# Altium PCB esp32-devkit-evse_未修改老版本.pcbdoc
Units mil, origin at the board's own origin, x right, y up, seen from the top; angles counter-clockwise.
Board outline 4947.01 x 3845 mil, 2 copper layers (Top Layer, Bottom Layer); 52 components, 67 nets, 171 pads, 0 vias.
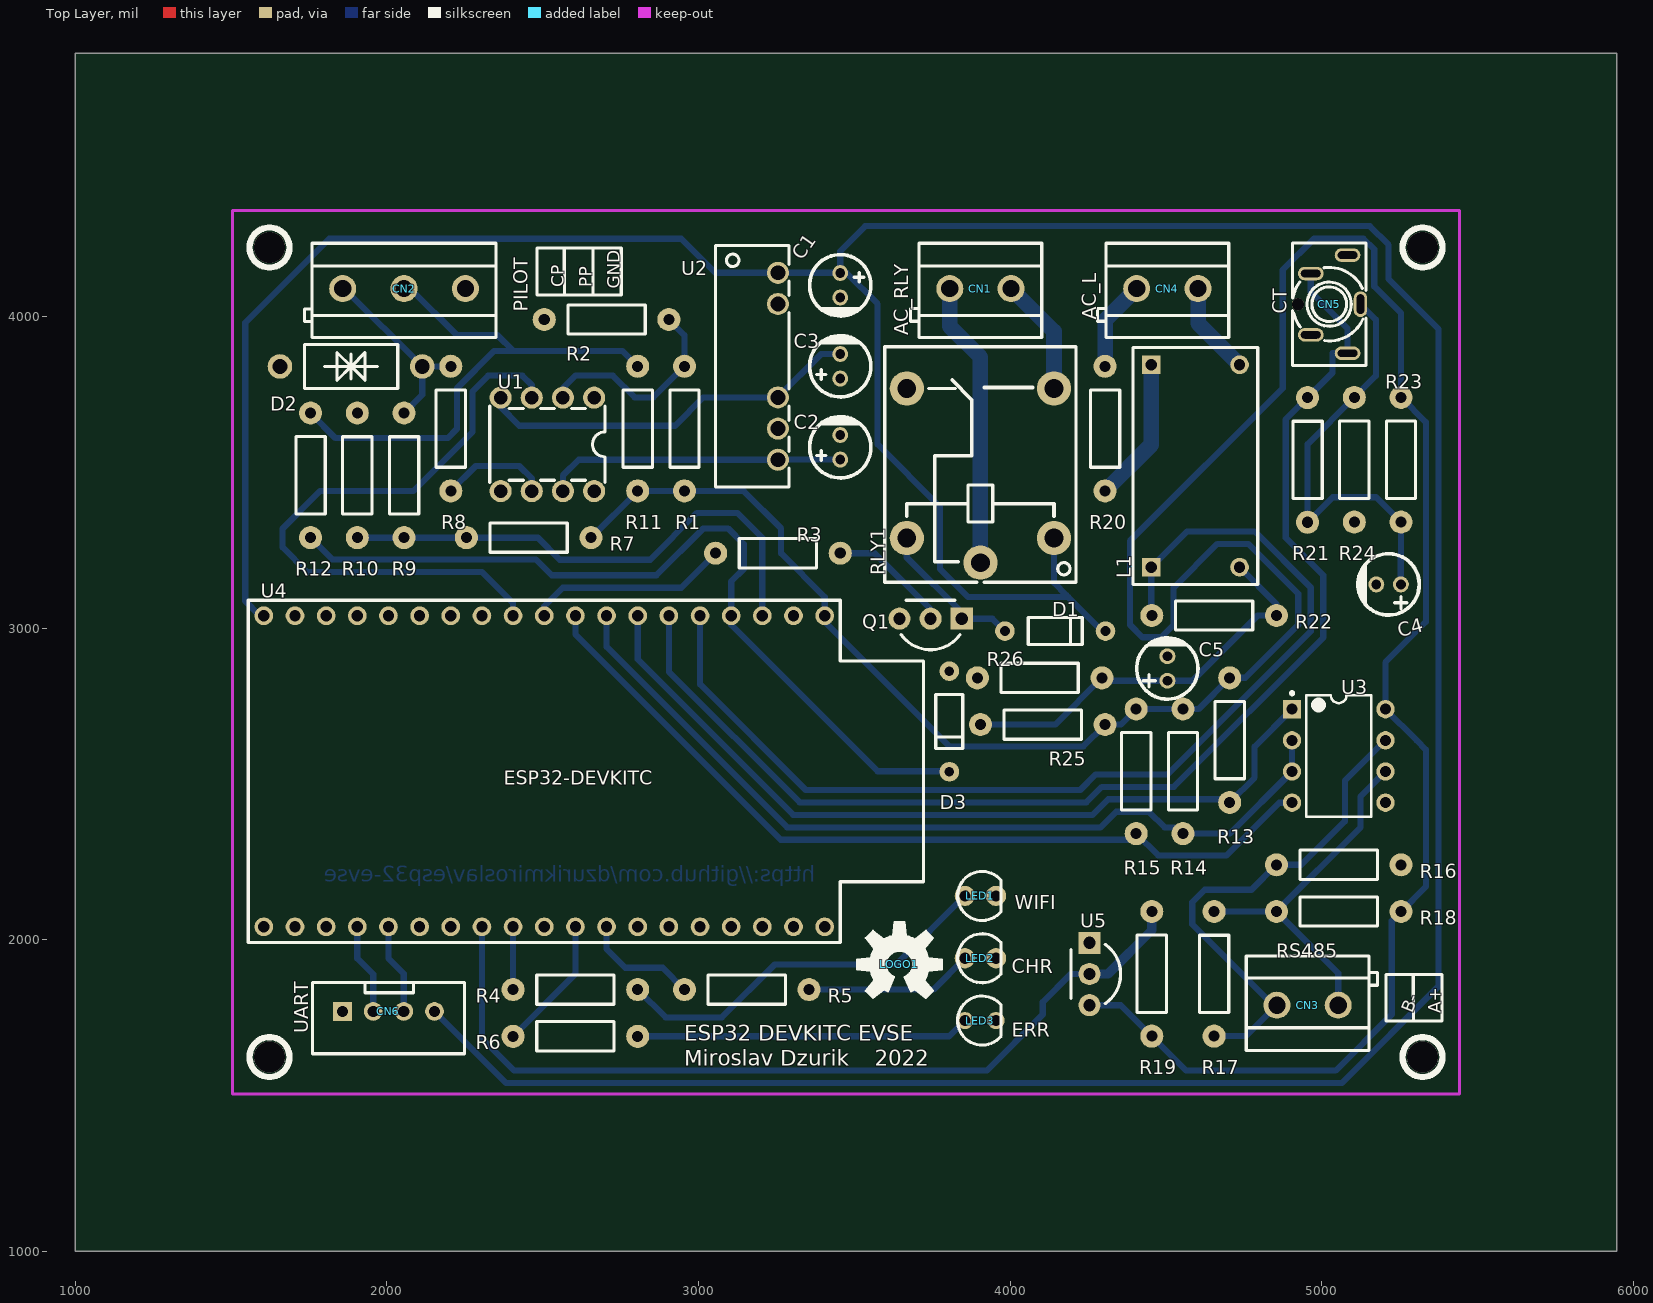
[diagram p0: Top Layer view]
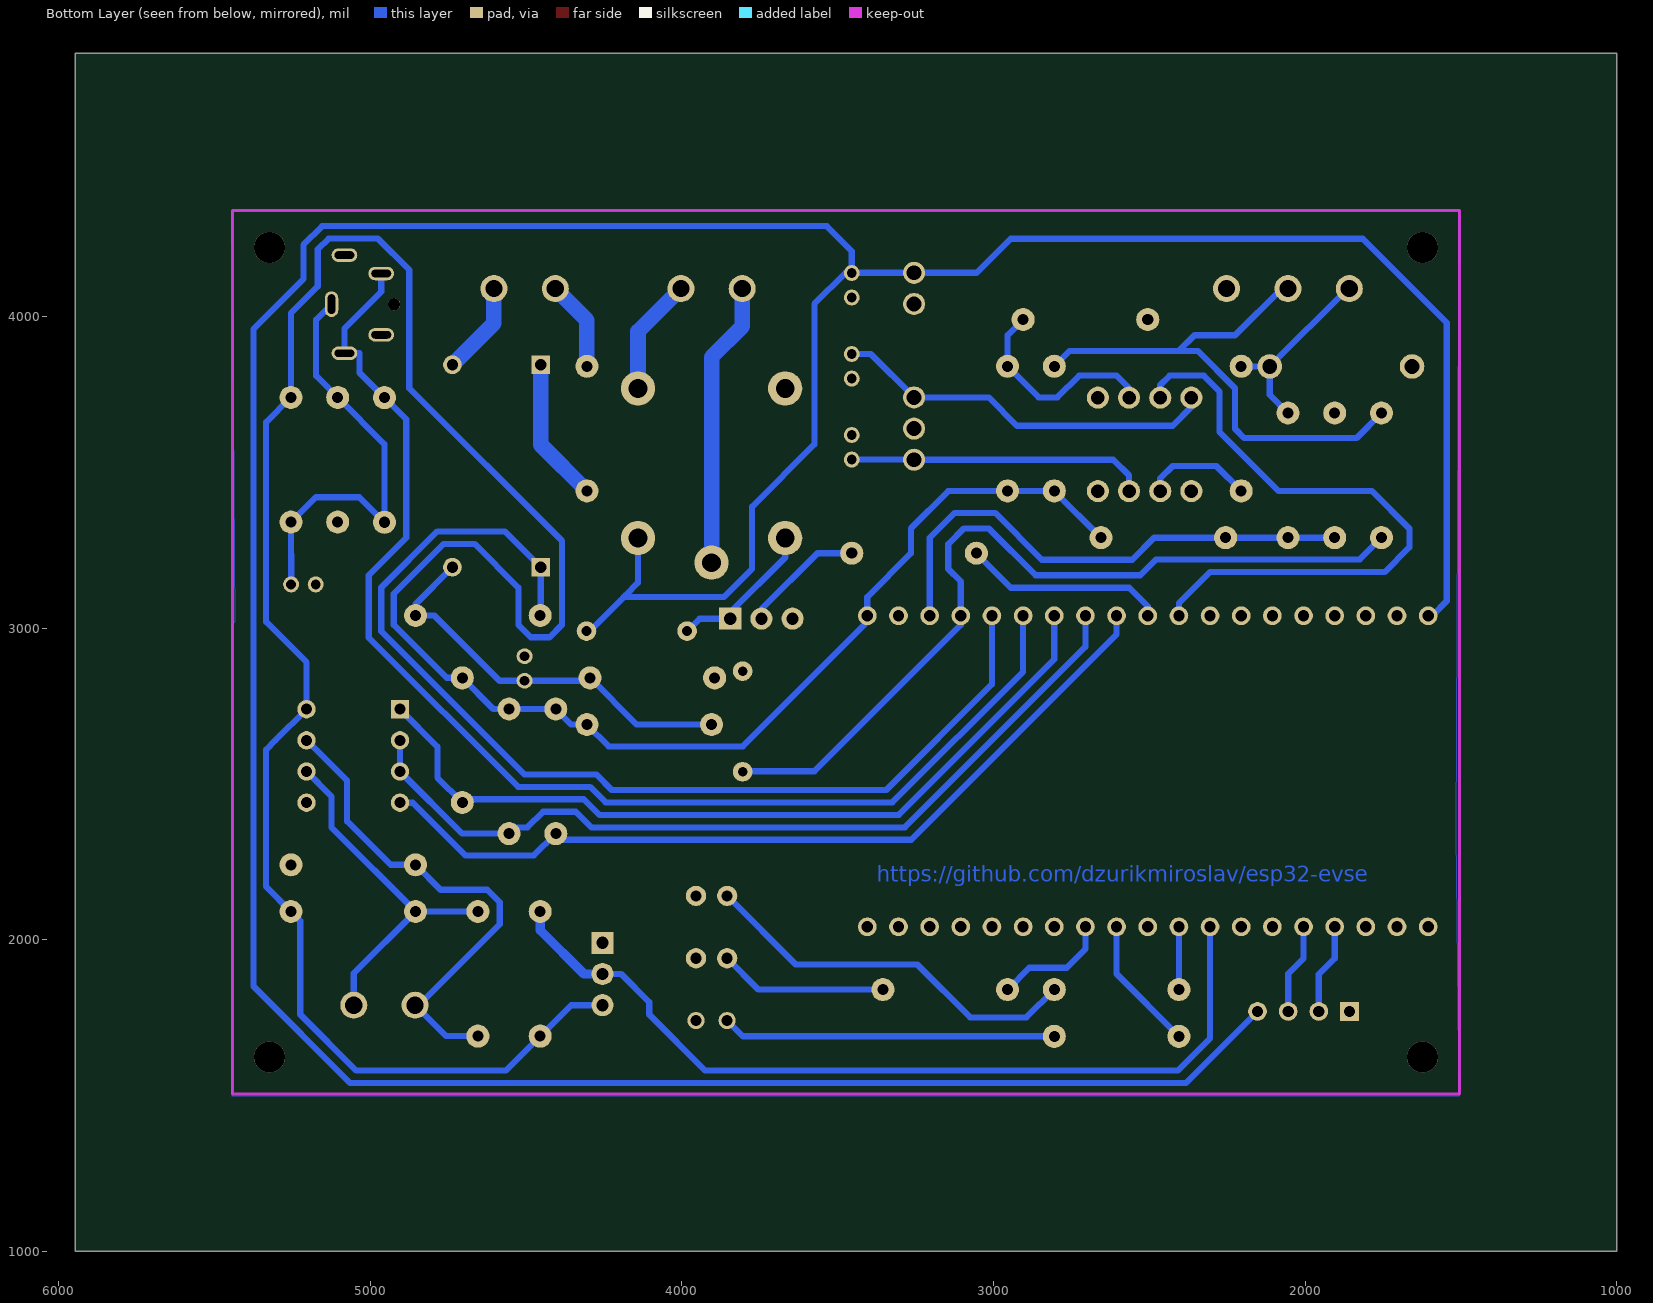
[diagram p1: Bottom Layer view, seen from below]

## Layer stack, top to bottom
Top Layer: signal copper (thickness not stored)
Dielectric: dielectric 12.6, FR-4, Dk 4.8
Bottom Layer: signal copper (thickness not stored)

## Board outline
5947.01,1000 1000,1000 1000,4845 5947.01,4845

## Components (designator, comment, footprint, x,y, rotation, side; value= is the part's Value field where it differs from the comment)
C1 "4u7" CAP-D5.0×F2.0 3455,4100.62 r270 top
C2 "1u" CAP-D5.0×F2.0 3454.95,3580.6 r90 top
C3 "1u" CAP-D5.0×F2.0 3454.95,3840.6 r90 top
C4 "10uF" CAP-TH_BD5.0-P2.00-D0.8-FD 5215,3140.62 r180 top
C5 "10uF" CAP-TH_BD5.0-P2.00-D0.8-FD 4505.04,2870.59 r90 top
CN1 "AC_RLY" CONN-TH_P5.00_KF301-5.0-2P 3904.98,4089.99 r180 top
CN2 "PILOT" CONN-TH_3P-P5.00_KF301-5.0-3P 2055,4089.99 r180 top
CN3 "RS485" CONN-TH_P5.00_KF301-5.0-2P 4954.98,1789.99 r0 top
CN4 "AC_L" CONN-TH_P5.00_KF301-5.0-2P 4504.98,4089.99 r180 top
CN5 "CT" AUDIO-TH_HOOYA_PJ-358 5045,4039.96 r270 top
CN6 "UART" CONN-TH_B4B-XH-A-G 2005.04,1769.99 r0 top
D1 "1N4148" DO-35_BD2.0-L4.2-P8.20-D0.5-RD 4145,2990.59 r180 top
D2 "P6KE16CA" DO-15_BD3.1-L6.7-P10.70-D0.9-BI 1885,3839.99 r0 top
D3 "BAT46" DO-35_BD2.0-L4.2-P8.20-D0.5-RD 3805,2700.59 r90 top
L1 "Qingxian" ZMPT107-1 4595,3520.62 r90 top
LED1 "WIFI" LED-TH_BD3.0_BLUE 3905,2140.62 r90 top
LED2 "CHR" LED-TH_BD3.0_GREEN 3905,1940.62 r90 top
LED3 "ERR" LED-TH_BD3.0_RED 3905,1740.62 r90 top
LOGO1 "OSHW-LOGOL" OSHW-LOGO-L 3645,1920.62 r0 top
Q1 "BC547B" TO-92-3_L4.9-W3.7-P2.54-L 3745,3030.62 r180 top
R1 "100K" R_AXIAL-0.4 2955,3640.62 r90 top
R2 "100K" R_AXIAL-0.4 2705,3990.62 r180 top
R3 "330" R_AXIAL-0.4 3255,3240.62 r0 top
R4 "330" R_AXIAL-0.4 2605,1839.99 r0 top
R5 "330" R_AXIAL-0.4 3155,1839.99 r0 top
R6 "330" R_AXIAL-0.4 2605,1689.99 r0 top
R7 "56K" R_AXIAL-0.4 2455,3290.59 r180 top
R8 "1K" R_AXIAL-0.4 2205,3640.62 r90 top
R9 "270K" R_AXIAL-0.4 2055,3490.59 r270 top
R10 "68K" R_AXIAL-0.4 1905,3490.59 r90 top
R11 "1K" R_AXIAL-0.4 2805,3640.62 r90 top
R12 "10K" R_AXIAL-0.4 1755,3490.62 r270 top
R13 "10K" R_AXIAL-0.4 4705,2640.62 r270 top
R14 "10K" R_AXIAL-0.4 4555,2540.62 r270 top
R15 "10K" R_AXIAL-0.4 4405,2540.62 r270 top
R16 "1K" R_AXIAL-0.4 5055,2240.59 r180 top
R17 "120" R_AXIAL-0.4 4655,1890.6 r90 top
R18 "1K" R_AXIAL-0.4 5055,2090.62 r0 top
R19 "4K7" R_AXIAL-0.4 4455,1890.62 r90 top
R20 "470K" R_AXIAL-0.4 4305,3640.59 r270 top
R21 "22" R_AXIAL-0.4 4955,3539.99 r270 top
R22 "1K" R_AXIAL-0.4 4655,3040.62 r0 top
R23 "100K" R_AXIAL-0.4 5255,3540.62 r270 top
R24 "100K" R_AXIAL-0.4 5105,3540.62 r270 top
R25 "100K" R_AXIAL-0.4 4105,2690.62 r180 top
R26 "100K" R_AXIAL-0.4 4095,2840.62 r180 top
RLY1 "SRD-05VDC-SL-C" RELAY-TH_SRD-XXVDC-XL-C 3905,3490 r90 top
U1 "TL081CP" PDIP-8_L9.3-W6.4-P2.54-LS7.6-BL 2515,3589.97 r180 top
U2 "E0512S-1WR3" PWRM-TH_E05XXS-1WR3 3255,3840.62 r270 top
U3 "MAX3485CPA" DIP-8_L9.8-W6.6-P2.54-LS7.6-BL 5055,2589.99 r270 top
U4 "ESP32-DEVKITC" ESP32-DEVKITC-32D 2505,2540.59 r180 top
U5 "DS18B20" TO-92-3_L4.9-W3.7-P2.54-L 4255,1889.99 r270 top

## Footprints (in the part's own frame and the unit in brackets; to place one, negate y for a bottom-side part, rotate by r counter-clockwise, add the part's x,y. Pads: shape width x height; smd on the part's side, far side on the other; paste and mask are expansions set on the pad)
AUDIO-TH_HOOYA_PJ-358 [mm]
  oval 2.1x1.1 hole 0.6 slot 1.6 at 0 deg: 2(0,2.025)
  oval 1.1x2.1 hole 0.6 slot 1.6 at 90 deg: 3(-4,0.975) 4(-2.5,-2.025) 5(2.5,-2.025) 6(4,0.975)
  round 1 hole 1 unplated: ""(0,-3.075)
  silkscreen extent -5,-3.52 5,2.48
CAP-D5.0×F2.0 [mm]
  round 1.3 hole 0.8: 1(-1,0) 2(1,0)
  silkscreen extent -2.5,-2.5 2.5,2.5
CAP-TH_BD5.0-P2.00-D0.8-FD [mm]
  round 1.3 hole 0.8: 1(-1,0) 2(1,0)
  silkscreen extent -2.5,-2.5 2.5,2.5
CONN-TH_3P-P5.00_KF301-5.0-3P [mm]
  round 2.2 hole 1.4: 1(-5,0) 2(0,0) 3(5,0)
  silkscreen extent -7.5,-3.7 8.13,4
CONN-TH_B4B-XH-A-G [mil]
  rect 60x60 hole 36: 1(-147.64,0)
  round 60 hole 36: 2(-49.21,0) 3(49.21,0) 4(147.64,0)
  silkscreen extent -244,-136 244,93
CONN-TH_P5.00_KF301-5.0-2P [mm]
  round 2.2 hole 1.4: 1(-2.5,0) 2(2.5,0)
  silkscreen extent -5,-3.7 5.71,4
DIP-8_L9.8-W6.6-P2.54-LS7.6-BL [mm]
  rect 1.5x1.5 hole 0.9: 1(-3.81,-3.81)
  round 1.5 hole 0.9: 2(-1.27,-3.81) 3(1.27,-3.81) 4(3.81,-3.81) 5(3.81,3.81) 6(1.27,3.81) 7(-1.27,3.81) 8(-3.81,3.81)
  silkscreen extent -5.23,-3.93 4.96,2.65
DO-15_BD3.1-L6.7-P10.70-D0.9-BI [mm]
  round 2 hole 1.2: 1(-5.8,0) 2(5.8,0)
  silkscreen extent -3.8,-1.8 3.8,1.8
DO-35_BD2.0-L4.2-P8.20-D0.5-RD [mm]
  round 1.6 hole 0.8: 1(-4.1,0) 2(4.1,0)
  silkscreen extent -2.2,-1.1 2.2,1.1
ESP32-DEVKITC-32D [mil]
  round 60 hole 36: 1(-900,-499.21) 2(-800,-499.21) 3(-700,-499.21) 4(-600,-499.21) 5(-500,-499.21) 6(-400,-499.21) 7(-300,-499.21) 8(-200,-499.21) 9(-100,-499.21) 10(0,-499.21) 11(100,-499.21) 12(200,-499.21) 13(300,-499.21) 14(400,-499.21) 15(500,-499.21) 16(600,-499.21) 17(700,-499.21) 18(800,-499.21) 19(900,-499.21) 20(-900,499.21) 21(-800,499.21) 22(-700,499.21) 23(-600,499.21) 24(-500,499.21) 25(-400,499.21) 26(-300,499.21) 27(-200,499.21) 28(-100,499.21) 29(0,499.21) 30(100,499.21) 31(200,499.21) 32(300,499.21) 33(400,499.21) 34(500,499.21) 35(600,499.21) 36(700,499.21) 37(800,499.21) 38(900,499.21)
  silkscreen extent -1218,-549 950,549
LED-TH_BD3.0_BLUE [mil]
  round 65 hole 35.43: 1(0,50) 2(0,-50)
  silkscreen extent -79,-66 79,73
LED-TH_BD3.0_GREEN [mil]
  round 65 hole 35.43: 1(0,50) 2(0,-50)
  silkscreen extent -79,-66 79,73
LED-TH_BD3.0_RED [mm]
  round 1.4 hole 0.9: 1(0,1.27) 2(0,-1.27)
  silkscreen extent -2,-1.69 2,1.87
OSHW-LOGO-L [mil]
  silkscreen extent -137,-109 137,137
PDIP-8_L9.3-W6.4-P2.54-LS7.6-BL [mm]
  round 1.8 hole 1.1: 1(-3.81,-3.81) 2(-1.27,-3.81) 3(1.27,-3.81) 4(3.81,-3.81) 5(3.81,3.81) 6(1.27,3.81) 7(-1.27,3.81) 8(-3.81,3.81)
  silkscreen extent -4.7,-3.11 4.7,3.11
PWRM-TH_E05XXS-1WR3 [mm]
  round 1.8 hole 1.2: 1(-7.62,0) 2(-5.08,0) 5(2.54,0) 6(5.08,0) 7(7.62,0)
  silkscreen extent -9.85,-5.1 9.85,0.9
R_AXIAL-0.4 [mil]
  round 74 hole 35.4: 1(-200,0) 2(200,0)
  silkscreen extent -124,-47 124,47
RELAY-TH_SRD-XXVDC-XL-C [mil]
  round 110 hole 60: 1(-200.79,-236.22) 2(279.53,-236.2) 3(279.53,236.2) 4(-200.79,236.22) 5(-279.53,0)
  silkscreen extent -342,-307 413,307
TO-92-3_L4.9-W3.7-P2.54-L [mm]
  rect 1.8x1.8 hole 1: 1(-2.54,0)
  round 1.8 hole 1: 2(0,0) 3(2.54,0)
  silkscreen extent -2.41,-1.5 2.41,2.54
ZMPT107-1 [mil]
  rect 60x60 hole 35.98: 1(-324.8,141.73) 3(324.8,141.73)
  round 60 hole 35.98: 2(-324.8,-141.73) 4(324.8,-141.73)
  silkscreen extent -380,-200 380,200

## Free pads (board coordinates)
  round 100 hole 100 unplated: ""(1623.11,1623.46) ""(1623.11,4221.89) ""(5323.89,1623.46) ""(5323.89,4221.89)

## Nets (pads, with @x,y where several pads share a name; then routed paths per layer and width w, separated by ;. In a path a pad name is that pad's centre, name@x,y a point inside that pad or via, vN(x,y) a via of type N, cw(c..) or ccw(c..) an arc to the next point about the centre after c; other vN are vias at no path point)
1WIRE: R19.2 U4.31 U5.2 | length 2820.7
  Bottom Layer w20: U4.31 2305,1683.69 2408.69,1580 3925,1580 4105,1760 4105,1800 4195,1890 U5.2
  Bottom Layer w30: U5.2 4314.4,1889.99 4455,2030.6 R19.2
+3V3: R1.1 R7.1 R11.1 R13.1 R14.1 R15.1 R18.2 R19.1 R23.1 R25.1 U3.8 U4.1 U5.3 | length 9345.8
  Bottom Layer w20: R7.1@2655,3290 2805,3440 2955,3440 3145,3440 3265,3320 3265,3240 3405,3100 U4.1 3405,3020 3804.37,2620.63 4235.04,2620.63 R25.1 ; U5.3 4354.99,1790 4455,1690 4564.99,1580 5045,1580 5225,1760 5225,2060.62 R18.2 5335,2170.59 5335,2609.99 5305,2639.99 U3.8 5205,2890 5335,3020 5335,3660.62 R23.1 5255,4010.59 5168.7,4096.9 5168.7,4216.3 5134.4,4250.6 4975.6,4250.6 4875,4149.99 4875,3769.99 4385,3279.99 4385,3010.59 4425,2970.59 4485,2970.59 4525,3010.59 4525,3129.99 4665.6,3270.59 4765,3270.59 4925,3110.59 4925,3010.59 4755,2840.59 R13.1 4605,2740.63 R14.1 R15.1 ; R25.1 4355,2690.63 R15.1
+5V: C1.1 CN6.4 D1.1 RLY1.1 U2.1 U4.19 | length 12728
  Bottom Layer w20: U4.19 1592.5,3039.8 1545,3087.3 1545,3979.99 1815,4249.99 2945,4249.99 3054.4,4140.6 U2.1 3475,4140.59 3575,4040.59 3575,3590 3775,3390 3775,3190.59 3865.6,3100 4187,3100 4296.37,2990.62 D1.1 ; CN6.4@2152.6,1769.99 2382.6,1539.99 5065,1539.99 5375,1849.99 5375,3960.59 5215,4120.6 5215,4229.99 5154.4,4290.6 3535.6,4290.6 3455,4209.99 C1.1 ; RLY1.1 4141.22,3145.8 4180.61,3106.41
+12V: C2.1 U1.7 U2.7 | length 961.2
  Bottom Layer w20: U1.7 2565,3489.99 2615.6,3540.59 U2.7 3255.64,3541.26 C2.1@3455,3541.26
-12V: C3.2 U1.4 U2.5 | length 1240.1
  Bottom Layer w20: U1.4 2365,3709.99 2425,3649.99 2925,3649.99 3015.6,3740.59 U2.5 3394.38,3879.99 C3.2
A+: CN3.2 R17.2 R18.1 U3.6 | length 1177.2
  Bottom Layer w20: R17.2 R18.1 ; CN3.2 5053.43,1892.2 R18.1 5125,2360.62 5125,2460 U3.6
AC_RLY: R3.1 U4.10 | length 651
  Bottom Layer w20: U4.10 2505,3070.59 2564.4,3129.99 2945,3129.99 R3.1@3055,3239.99
B-: CN3.1 R16.2 R17.1 U3.7 | length 1603.6
  Bottom Layer w20: R17.1 4757.2,1690.62 CN3.1 4845,1789.99 4585,2049.99 4585,2120.59 4625,2160.59 4775,2160.59 R16.2 4935,2240.59 5075,2380.59 5075,2509.99 U3.7
C4_1: C4.1 CN5.2 R21.2 R23.2 R24.1 | length 1377.8
  Bottom Layer w20: CN5.2 5174.2,3990.49 5174.2,3809.82 R24.1 4955,3590.62 R21.2 5035.6,3420.59 5175,3420.59 R23.2 C4.1
C5_1: C5.1 L1.2 R22.2 R25.2 R26.1 | length 1306.9
  Bottom Layer w20: R25.2 4145,2690.63 R26.1 ; R26.1 4304.38,2831.26 4505,2831.26 4585.63,2831.26 4795,3040.63 R22.2 ; L1.2 4855,3077.55 R22.2
CN1_1: CN1.1 RLY1.2 | length 377.5
  Bottom Layer w50: CN1.1 4141.19,3952.23 RLY1.2
CN1_2: CN1.2 RLY1.5 | length 920.3
  Bottom Layer w50: CN1.2 3806.58,3968.42 3905,3870 RLY1.5
CN4_1: CN4.1 L1.4 | length 299.8
  Bottom Layer w50: CN4.1 4603.43,3978.73 L1.4
CN4_2: CN4.2 R20.1 | length 291.5
  Bottom Layer w50: R20.1 4305,3988.43 CN4.2
CN5_3: CN5.3
CN5_5: CN5.5
CP_OUT: CN2.3 D2.2 R8.2 R9.1 | length 638
  Bottom Layer w20: CN2.3@1858.15,4090 1863.35,4090 2113.35,3840 2113.35,3748.97 R9.1 ; D2.2@2123.4,3830 2113.4,3840 R8.2
CP_PWM: U1.3 U4.11 | length 2047.5
  Bottom Layer w20: U4.11 2405,3080.59 2305.6,3179.99 1745,3179.99 1665,3259.99 1665,3319.99 1785,3439.99 2085,3439.99 2275,3629.99 2275,3759.99 2325.6,3810.59 2435,3810.59 2465,3780.59 U1.3
CP_SENS: R7.2 R9.2 R10.1 U4.3 | length 1674.4
  Bottom Layer w20: R10.1@1905,3290 2054.99,3290 2255,3290 2485,3290 2555,3220 2845,3220 2995,3370 3125,3370 3205,3290 U4.3
CUR_SENS: CN5.4 CN5.6 R21.1 U4.6 | length 4050.4
  Bottom Layer w20: U4.6 2905,2860 3324.36,2440.64 4245.02,2440.64 4295,2490.63 4525.63,2490.63 5005,2970 5005,3170 4885,3290 4885,3670 5035,3820 5035,3882.5 CN5.6 5083.38,3961.62 4965.27,4079.72 CN5.4
GND: C1.2 C2.2 C3.1 C4.2 C5.2 CN2.1 CN6.1 D2.1 D3.2 LED1.2 LED2.2 LED3.2 Q1.3 R2.2 R10.2 R16.1 R24.2 R26.2 U2.2 U2.6 U3.5 U4.14 U4.20 U4.26 U5.1
L1_3: L1.3 R20.2 | length 466.2
  Bottom Layer w50: R20.2 4453.27,3588.89 L1.3
LED_CHR: R5.1 U4.27 | length 375.3
  Bottom Layer w20: U4.27 2705,1970 2765,1910 2885,1910 R5.1
LED_ERR: R6.1 U4.28 | length 434.3
  Bottom Layer w20: R6.1 2605,1890 U4.28
LED_WIFI: R4.1 U4.30 | length 201.4
  Bottom Layer w20: R4.1 U4.30
PP_OUT: CN2.2 R11.2 R12.1 | length 1729.2
  Bottom Layer w20: R12.1 1835,3609.99 2195,3609.99 2225,3639.99 2225,3770.59 2344.4,3889.99 2755,3889.99 R11.2 ; CN2.2 2075,4090 2225,3940 2355,3940 2405,3890
PP_SENS: D3.1 R12.2 U4.4 | length 2693.2
  Bottom Layer w20: R12.2@1755,3290 1824.37,3220.63 2478.27,3220.63 2528.89,3170 2865,3170 3015,3320 3095,3320 3145,3270 3145,3190 3105,3150.01 U4.4 ; U4.4 3105,3010.59 3575,2540.59 D3.1@3805,2540.59
Q1_2: Q1.2 R3.2 | length 394.6
  Bottom Layer w20: R3.2 3565,3240.59 3745,3060.59 Q1.2
R4_2: LED1.1 R4.2 | length 1248.6
  Bottom Layer w20: R4.2 2894.4,1750.6 3075,1750.6 3245,1920.6 3635,1920.6 LED1.1
R5_2: LED2.1 R5.2 | length 541.7
  Bottom Layer w20: R5.2 3754.37,1839.99 LED2.1
R6_2: LED3.1 R6.2 | length 1071
  Bottom Layer w20: R6.2 3804.37,1689.99 LED3.1
RLY1_3: RLY1.3
RLY1_4: D1.2 Q1.1 RLY1.4 | length 486.7
  Bottom Layer w20: RLY1.4 3668.78,3226.84 3845,3050.62 Q1.1 3943.59,3030.62 D1.2
RS485_DIR: R14.2 U3.2 U3.3 U4.8 | length 2772.1
  Bottom Layer w20: U4.8 2705,2940 3284.37,2360.63 4290.59,2360.59 4340.62,2410.63 4445.89,2410.63 4495.92,2360.59 4535,2360.63 R14.2 ; R14.2 4705.6,2340.59 U3.3 U3.2
RS485_RXD: R13.2 U3.1 U4.7 | length 2659.7
  Bottom Layer w20: U4.7 2805,2899.99 3304.4,2400.59 4265,2400.59 4315.03,2450.63 4705,2450.63 R13.2 4785,2520.59 4785,2619.99 U3.1
RS485_TXD: R15.2 U3.4 U4.9 | length 2740.4
  Bottom Layer w20: U4.9 2605,2980 3264.37,2320.63 4385,2320.63 R15.2 ; R15.2 4475,2270.59 4695,2270.59 4864.4,2439.99 U3.4
S$5523: 
S$5525: 
S$5527: 
S$5529: 
S$5531: 
U1_1: U1.1
U1_2: R1.2 R2.1 U1.2 | length 678.3
  Bottom Layer w20: U1.2 2565,3770.59 2605,3810.59 2725,3810.59 2795,3740.59 2855,3740.59 R1.2 2955,3940.62 R2.1
U1_5: U1.5
U1_6: R8.1 U1.6 | length 350.3
  Bottom Layer w20: R8.1 2285,3520.59 2425,3520.59 2465,3480.59 U1.6
U1_8: U1.8
U4_2: U4.2
U4_12: U4.12
U4_13: U4.13
U4_15: U4.15
U4_16: U4.16
U4_17: U4.17
U4_18: U4.18
U4_21: U4.21
U4_22: U4.22
U4_23: U4.23
U4_24: U4.24
U4_25: U4.25
U4_29: U4.29
U4_32: U4.32
U4_33: U4.33
U4_36: U4.36
U4_37: U4.37
U4_38: U4.38
UART_RX: CN6.3 U4.34 | length 291.8
  Bottom Layer w20: U4.34 2005,1939.99 2054.21,1890.79 CN6.3@2054.21,1770
UART_TX: CN6.2 U4.35 | length 292.5
  Bottom Layer w20: U4.35 1905,1939.99 1955.79,1889.21 CN6.2
VLT_SENS: L1.1 R22.1 U4.5 | length 3461.7
  Bottom Layer w20: U4.5 3005,2819.99 3344.4,2480.59 4225,2480.59 4275,2530.59 4505.6,2530.59 4965,2989.99 4965,3130.59 4785,3310.59 4568.1,3310.59 L1.1 ; L1.1 4453.27,3042.36 R22.1
pads on no net: CN5.

## Polygon pours and split planes (outlines as drawn)
GND on Bottom Layer (solid): 1505,4340 5445,4340 5435,3020 5445,3010 5445,1500 3655,1500 1505,1500 1515,2340 1505,4340

## Other copper
Bottom Layer:
  text "https://github.com/dzurikmiroslav/esp32-evse" at 3375,2185.62 h50

## Silkscreen, mask and mechanical layers (free items; w line width, h text height)
Top Overlay:
  circle w20: c5323.89,4221.89 r64.03
  circle w20: c5323.89,1623.46 r64.03
  circle w20: c1623.11,1623.46 r64.03
  circle w20: c1623.11,4221.89 r64.03
  lines w10 net S$5523: 2482,4069.7 2752,4069.7 2752,4220.81 ; 5207,1738.59 5387,1738.58
  lines w10 net S$5525: 2482,4220.07 2752,4220.81 ; 5207,1888.95 5387,1888.58
  lines w10 net S$5527: 2662,4069.7 2662,4219.7 ; 5387,1738.58 5387,1888.58
  lines w10 net S$5529: 2569.19,4219.7 2569.72,4069.7 ; 5294.19,1888.58 5294.72,1738.58
  lines w10 net S$5531: 2482,4069.7 2482,4220.07 ; 5207,1738.58 5207,1888.95
  text "CP" at 2567,4094.7 h40 r90
  text "PP" at 2657,4094.7 h40 r90
  text "GND" at 2747,4089.7 h40 r90
  text "A+" at 5382,1764.69 h40 r90
  text "B-" at 5290.54,1762.2 h40 r68
  text "ESP32 DEVKITC EVSE" at 2955,1675.62 h50
  text "Miroslav Dzurik" at 2955,1595.62 h50
  text "2022" at 3565,1595.62 h50